# EAGLE board Adafruit BMP388 QT (EAGLE 9.6.2)
REV: B
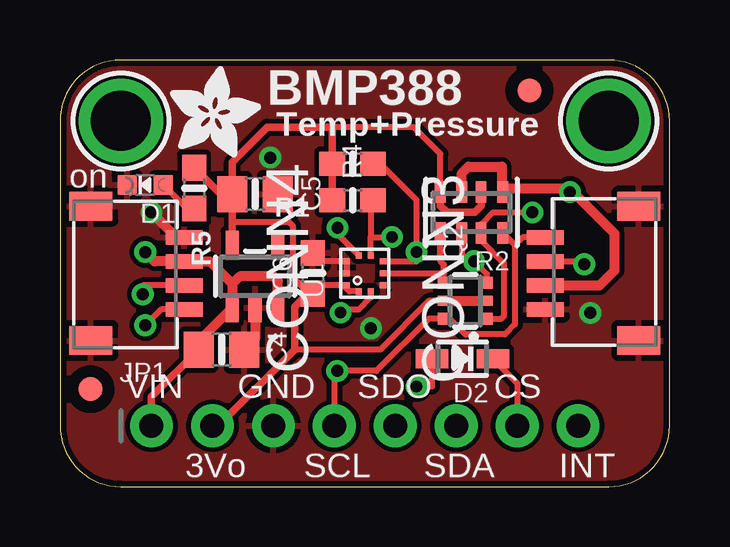
[diagram p0: board, top side]
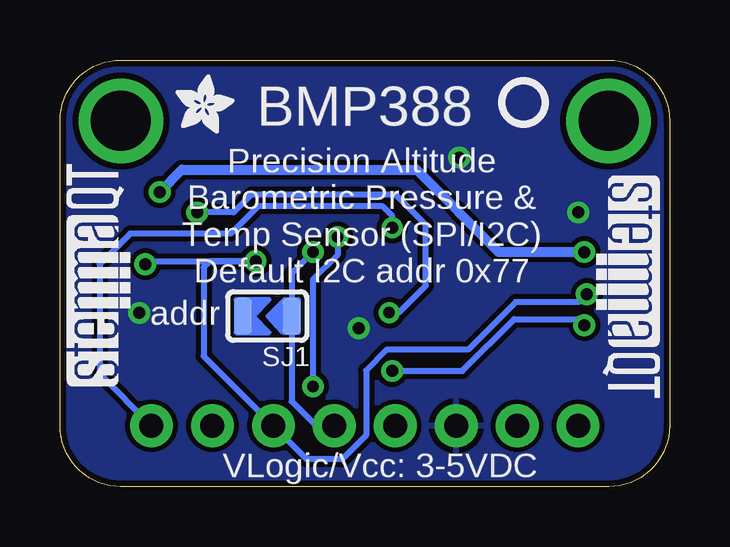
[diagram p1: board, bottom side, seen from below]

Size 25.4 x 17.78 mm. Coordinates in mm from the lower left corner, seen from the top.
Outline: 0,15.24 0,2.54 arc90 2.54,0 22.86,0 arc90 25.4,2.54 25.4,15.24 arc90 22.86,17.78 2.54,17.78 arc90 0,15.24
Copper layers (1*16): Top 0.035mm / dielectric 1.5mm / Bottom 0.035mm
Design rules "adafruit *": minimum track width 8mil, minimum drill 15.5mil, track to track 8mil, track to pad 8mil, pad to pad 8mil, via to via 8mil, smd to smd 8mil, copper to edge 10mil, drill to drill 8mil, minimum pad ring 10mil, minimum via ring 8mil, stop-mask expansion 2mil, vias tented up to drill 20mil, thermal gap 10mil
Net classes: 1 highpower: width 0.305 mm, drill 0.483 mm; 2 lowpower: width 0.254 mm, drill 0.483 mm

## Footprints (pad centres in the part's own frame; a part is rotated, then mirrored left to right if it is on the bottom)
0805-NO = smd 1.24 x 1.5: 1 -0.95,0; 2 0.95,0
0603-NO = smd 1.075 x 1: 1 -0.85,0; 2 0.85,0
JST_SH4 = smd 0.6 x 1.55: 1 -1.5,2.514; 2 -0.5,2.514; 3 0.5,2.514; 4 1.5,2.514 | smd 1.2 x 1.8: MT1 -2.8,-1.386; MT2 2.8,-1.386
CHIPLED_0603_NOOUTLINE = smd 0.8 x 0.8: A 0,-0.75; C 0,0.75
SOD-323 = smd 1.35 x 0.8: A 1.27,0; C -1.27,0
FIDUCIAL_1MM = smd 1 x 1: 1 0,0
BMP388 = smd 0.25 x 0.275: 1 0.25,0.75; 2 -0.25,0.75; 6 -0.25,-0.75; 7 0.25,-0.75 | smd 0.275 x 0.25: 3 -0.762,0.5; 4 -0.762,0; 5 -0.762,-0.5; 8 0.762,-0.5; 9 0.762,0; 10 0.762,0.5
1X08_ROUND_70 = drill 1 pad 1.778: 1 -8.89,0; 2 -6.35,0; 3 -3.81,0; 4 -1.27,0; 5 1.27,0; 6 3.81,0; 7 6.35,0; 8 8.89,0
SOT363 = smd 0.5 x 0.5: 1 -0.75,-0.9; 3 0.75,-0.9; 4 0.75,0.9; 6 -0.75,0.9 | smd 0.4 x 0.5: 2 0,-0.9; 5 0,0.9
RESPACK_4X0603 = smd 0.45 x 0.9: 1 -1.3,-0.85; 2 -0.4,-0.85; 3 0.4,-0.85; 4 1.3,-0.85; 5 1.3,0.85; 6 0.4,0.85; 7 -0.4,0.85; 8 -1.3,0.85
SOLDERJUMPER_ARROW_NOPASTE = smd 0.762 x 1.524: 1 -1.016,0; 2 1.016,0
SOT23-5 = smd 0.55 x 1.2: 1 -0.95,-1.3; 2 0,-1.3; 3 0.95,-1.3; 4 0.95,1.3; 5 -0.95,1.3
MOUNTINGHOLE_2.5_PLATED = drill 2.5 pad 3.2: P$1 0,0

## Placement (x,y rotation side)
C4  10uF  [0805-NO]  6.73,5.71 0 top
C5  10uF  [0805-NO]  8.13,12.19 0 top
C6  0.1uF  [0603-NO]  10.54,8.89 90 top
CONN3  STEMMA_I2C_QT  [JST_SH4]  22.73,8.89 90 top
CONN4  STEMMA_I2C_QT  [JST_SH4]  2.67,8.89 270 top
D1  GREEN  [CHIPLED_0603_NOOUTLINE]  3.56,12.57 90 top
D2  1N4148  [SOD-323]  16.76,5.33 180 top
FID3  FIDUCIAL_1MM  [FIDUCIAL_1MM]  1.27,4.06 0 top
FID4  FIDUCIAL_1MM  [FIDUCIAL_1MM]  19.56,16.51 0 top
IC1  BMP388  [BMP388]  12.7,8.89 180 top
JP1  [1X08_ROUND_70]  12.7,2.54 0 top
Q2  BSS138  [SOT363]  16.89,7.75 90 top
R1  10K  [0603-NO]  12.19,11.94 180 top
R2  10K  [RESPACK_4X0603]  17.14,11.43 180 top
R4  10K  [0603-NO]  12.19,13.46 180 top
R5  10K  [0603-NO]  5.59,12.45 270 top
SJ1  [SOLDERJUMPER_ARROW_NOPASTE]  16.76,7.11 180 bottom
U1  AP2112K-3.3  [SOT23-5]  8.13,8.76 0 top
U$2  [ADAFRUIT_2.5MM]  20.57,14.73 0 bottom
U$40  MOUNTINGHOLE2.5  [MOUNTINGHOLE_2.5_PLATED]  2.54,15.24 0 top
U$41  MOUNTINGHOLE2.5  [MOUNTINGHOLE_2.5_PLATED]  22.86,15.24 0 top
U$46  [ADAFRUIT_3.5MM]  4.57,13.72 0 top
U$47  [PCBFEAT-REV-040]  6.1,16 0 bottom
U$48  [STEMMAQT]  22.48,4.19 90 bottom
U$49  [STEMMAQT]  3.05,12.95 270 bottom

## Library data of the parts
C4-C6 CONN3 CONN4 D1 D2 IC1 JP1 Q2 R1 R2 R4 R5 U1 U$2 U$46 U$47 = microbuilder
FID3 FID4 SJ1 U$40 U$41 = microbuilder; BOM: EXCLUDE
U$48 U$49 = silks

## Nets
3.3V: C5.1 C6.1 IC1.1 IC1.10 JP1.2 Q2.2 Q2.5 R1.2 R2.2 R2.4 R4.2 R5.1 U1.5
CS: D2.C JP1.7
CS_3V: D2.A IC1.6 R1.1
GND: C4.2 C5.2 C6.2 CONN3.1 CONN3.MT1 CONN3.MT2 CONN4.1 CONN4.MT1 CONN4.MT2 D1.C IC1.3 IC1.8 IC1.9 JP1.3 SJ1.2 U1.2
INT: IC1.7 JP1.8
N$1: D1.A R5.2
SCK/SCL: CONN3.4 CONN4.4 JP1.4 Q2.6 R2.8
SCK_3V: IC1.2 Q2.1 R2.7
SDI/SDA: CONN3.3 CONN4.3 JP1.6 Q2.3 R2.6
SDI_3V: IC1.4 Q2.4 R2.5
SDO/ADR: IC1.5 JP1.5 R4.1 SJ1.1
VCC [highpower]: C4.1 CONN3.2 CONN4.2 JP1.1 R2.1 R2.3 U1.1 U1.3

## Tracks (layer width: path | path; a pad name or v marks a point on that pad's centre or on a via)
3.3V
  Top 0.254: 7.18,11.05 9.53,11.05 9.72,10.86 9.72,10.42 9.71,10.41 9.71,8.7 10.38,8.04 C6.1 10.89,8.39 11.81,8.39 | IC1.10 11.81,8.39 | IC1.1 12.06,8.14 11.81,8.39 | R2.4 15.85,13.87 14.73,14.99 11.34,14.99 | Q2.5 15.37,7.75 13.34,5.71 9.78,5.71
  Top 0.305: R2.2 17.55,11.7 17.27,11.43 16.13,11.43 15.85,11.71 R2.4 | C5.1 7.18,11.05 U1.5 | R5.1 6.69,12.19 C5.1 | C5.1 7.18,13.53 8.64,14.99 11.34,14.99 R4.2 R1.2 | JP1.2 6.6,2.54 9.78,5.71 9.78,7.49 10.33,8.04 C6.1
  Top 0.406: Q2.5 Q2.2
CS
  Top 0.254: D2.C 19.05,4.32 JP1.7
CS_3V  (via drill 0.48)
  Top 0.254: IC1.6 12.95,10.39 12.94,10.4 | R1.1 12.95,11.85 12.95,10.41 12.94,10.4 | 12.94,10.4 v13.83,10.4 | v14.86,4.18 15.49,4.18 D2.A
  Bottom 0.254: v13.83,10.4 13.83,9.66 14.86,8.64 v14.86,4.18
GND  (via drill 0.5)
  Top 0.254: IC1.9 IC1.8 10.89,9.39 C6.2
  Top 0.406: U1.2 8.13,6.16 C4.2 | CONN4.1 4.85,10.39 v3.81,11.43
  other vias: 22.1,7.24 8.76,13.72 12.95,6.6
  pour Top: 0,17.78 25.4,17.78 25.4,0 0,0
  pour Bottom: 0,17.78 25.4,17.78 25.4,0 0,0
INT  (via drill 0.48)
  Top 0.254: IC1.7 11.56,10.53 v11.56,10.79
  Bottom 0.254: v11.56,10.79 11.56,11.3 11.94,11.68 17.14,11.68 18.29,10.54 22.48,10.54 23.75,9.27 23.75,4.7 JP1.8
N$1
  Top 0.254: D1.A 5.28,11.6 R5.2
SCK/SCL  (via drill 0.5)
  Top 0.254: 18.95,10.07 18.95,6.76 18.54,6.35 16.89,6.35 16.24,7 Q2.6 15.36,7 13.19,4.83 v11.56,4.83 11.43,4.7 JP1.4 | CONN4.4 4.21,7.39 v3.56,6.73 | R2.8 18.95,10.07 | CONN3.4 19.27,10.39 18.95,10.07
  Bottom 0.254: v11.56,4.83 8.64,4.83 6.48,6.99 3.81,6.99 v3.56,6.73
SCK_3V  (via drill 0.48, 0.5)
  Top 0.254: v19.68,11.43 18.03,11.43 17.55,10.94 R2.7 17.55,10.27 18.5,9.32 18.5,7.11 18.38,7 Q2.1 | IC1.2 12.95,7.89 12.44,7.38 11.81,7.38 v11.68,7.25
  Bottom 0.254: v11.68,7.25 11.29,7.25 10.16,8.38 10.16,10.92 11.4,12.17 17.42,12.17 18.16,11.43 v19.68,11.43
SDI/SDA  (via drill 0.5)
  Top 0.254: CONN4.3 3.45,8.39 v3.45,8.02 | CONN3.3 21.73,9.39 v21.84,9.27 | R2.6 16.75,9.69 17.04,9.4 v17.25,9.4 17.79,8.86 Q2.3
  Bottom 0.254: v21.84,9.27 21.72,9.4 v17.25,9.4 19.16,9.4 19.41,9.14 19.41,5.44 JP1.6 15.11,1.14 13.64,1.14 12.65,2.14 12.65,4.84 11.78,5.71 8.39,5.71 6.41,7.7 3.78,7.7 v3.45,8.02
SDI_3V
  Top 0.254: Q2.4 15.99,8.89 | 15.99,8.89 15.99,9.26 15.85,9.4 R2.5 | IC1.4 15.99,8.89
SDO/ADR  (via drill 0.48)
  Top 0.254: IC1.5 14.86,9.39 v14.86,9.78 14.86,11.94 13.34,13.46 R4.1
  Bottom 0.203: SJ1.1 15.75,6.6
  Bottom 0.254: v14.86,9.78 15.75,8.89 SJ1.1 | JP1.5 14.73,2.54 15.75,3.56 15.75,6.6
VCC  (via drill 0.5)
  Top 0.305: C4.1 3.81,3.74 JP1.1
  Top 0.406: R2.3 16.75,13.06 17.02,13.34 18.41,13.34 18.41,12.31 R2.1 18.57,12.41 21.12,12.41 v21.25,12.28 21.38,12.28 23.11,10.54 23.11,9.02 22.49,8.39 CONN3.2 | C4.1 5.78,6.07 U1.1 7.18,8.45 | U1.3 9.08,8.57 8.89,8.76 7.49,8.76 7.18,8.45 | 7.18,8.45 6.24,9.39 CONN4.2 3.94,9.39 v3.56,9.78
  Bottom 0.406: v21.25,12.28 20.32,13.21 10.54,13.21 7.11,9.78 v3.56,9.78

## Text on the board
tPlace: BMP388 | Temp+Pressure | on | SDO | CS | VIN | GND | 3Vo | SCL | SDA | INT
bPlace: BMP388 | Precision Altitude / Barometric Pressure & / Temp Sensor (SPI/I2C) / Default I2C addr 0x77 | addr | VLogic/Vcc: 3-5VDC